# Altium PCB PhotodiodeBoard.PcbDoc
Units mm, origin at the board's own origin, x right, y up, seen from the top; angles counter-clockwise.
Board outline 61 x 33.2 mm, 4 copper layers (Top Layer, GND, 3V3, Bottom Layer), stack 0.778 mm thick; 109 components, 49 nets, 290 pads, 118 vias.
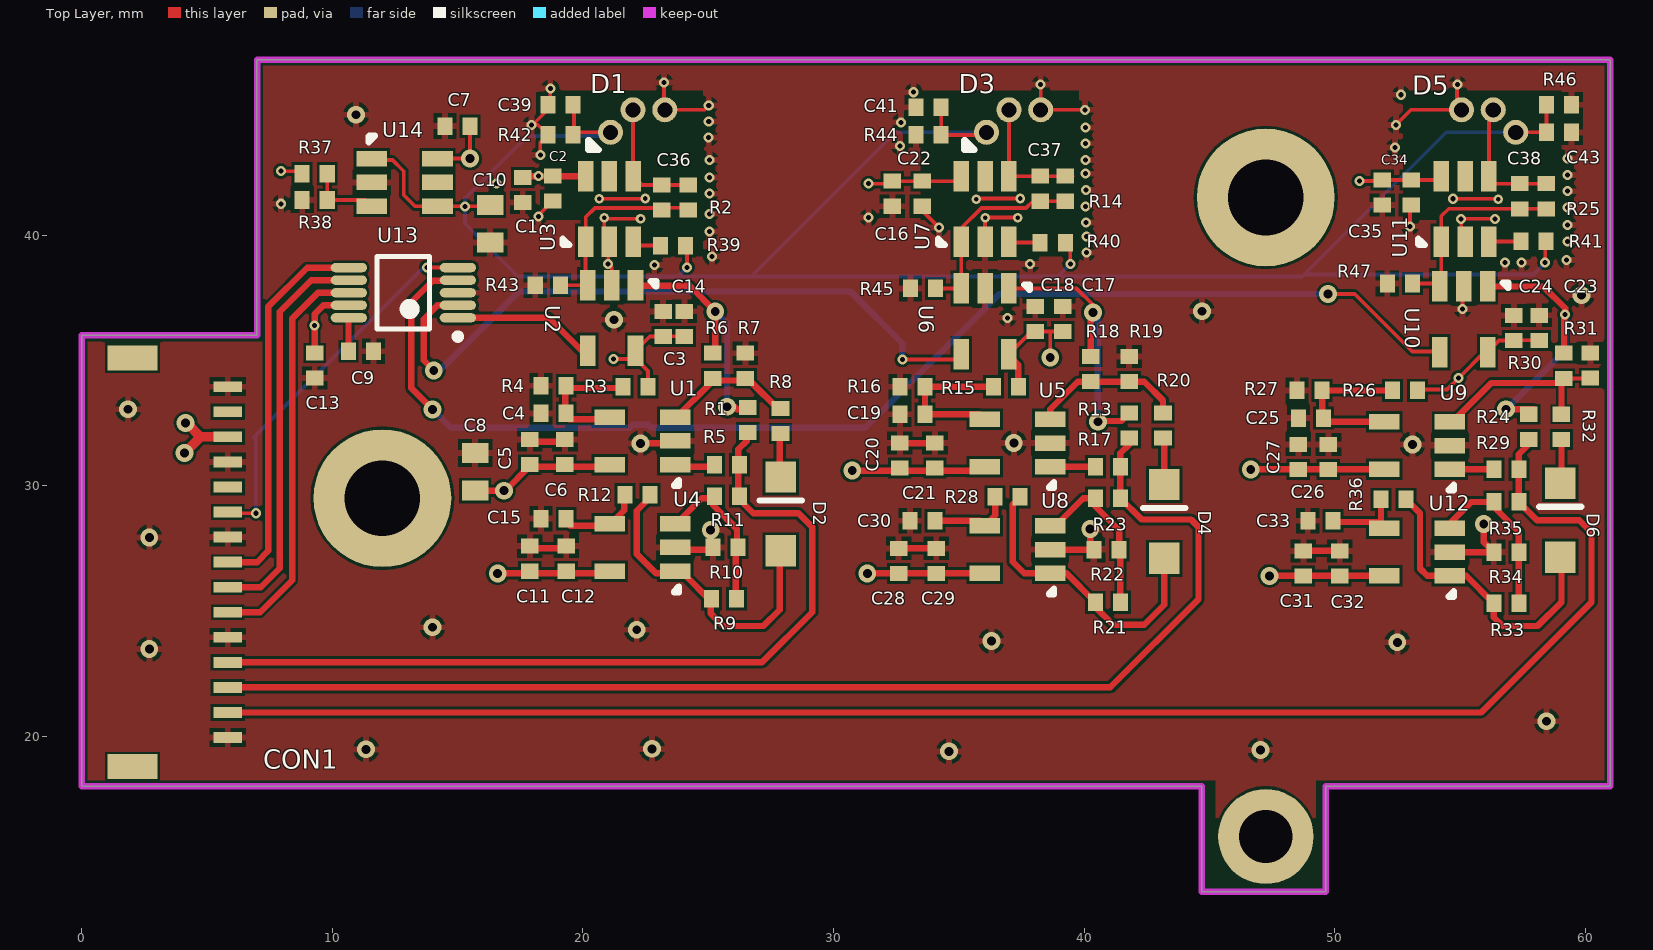
[diagram p0: Top Layer view]
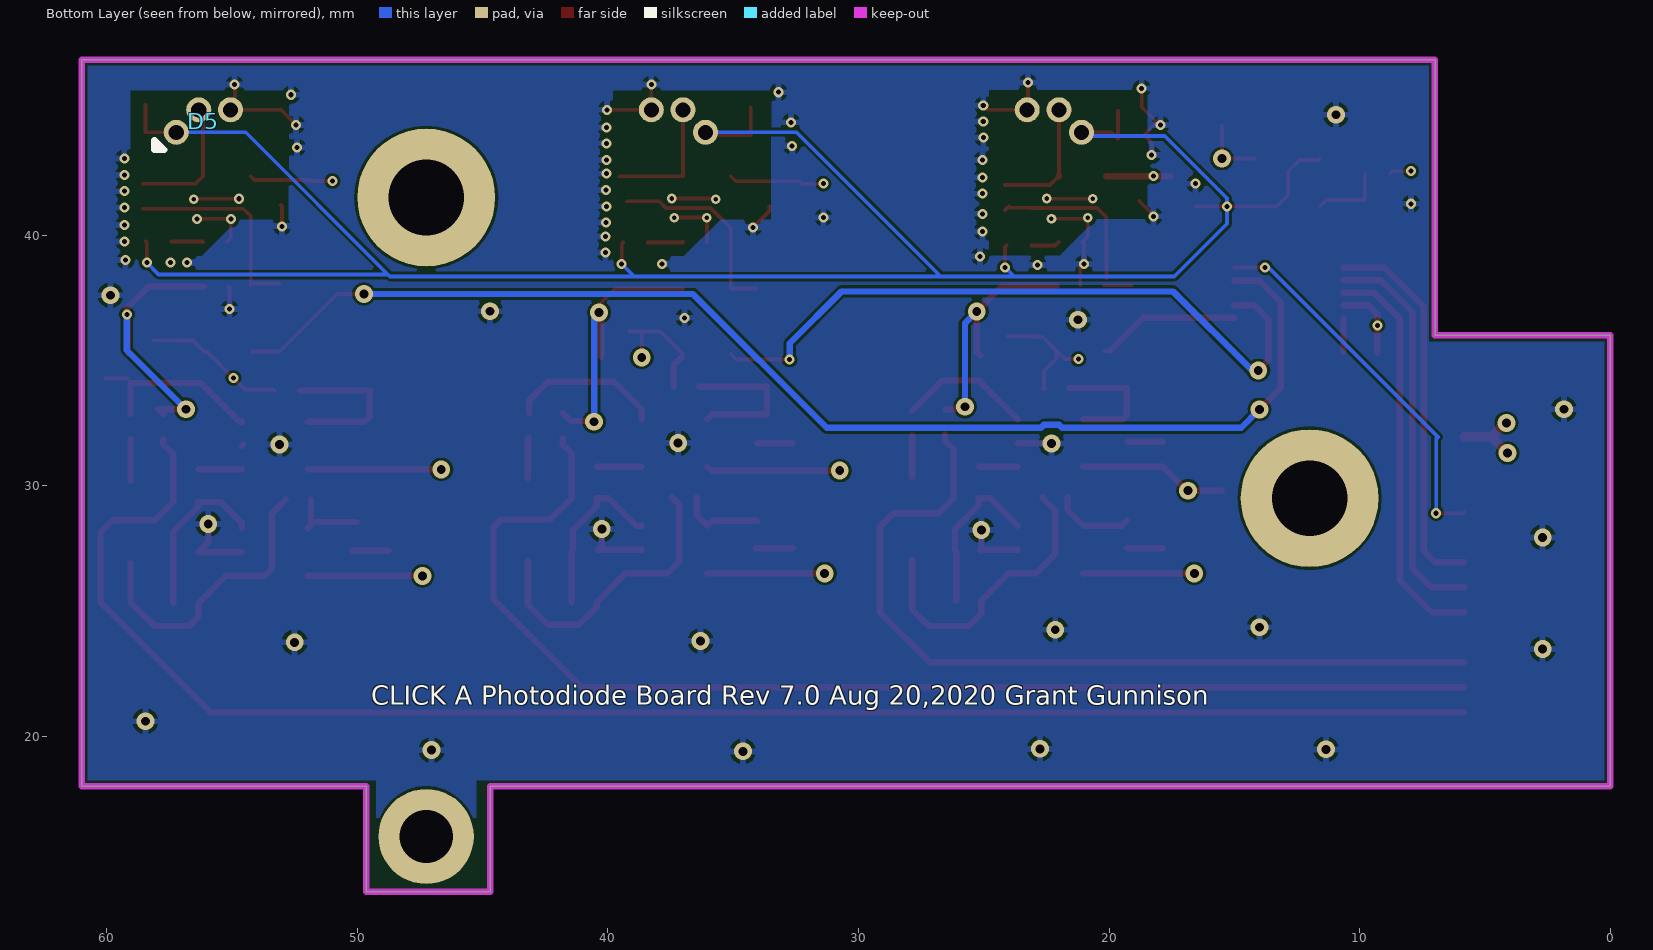
[diagram p1: Bottom Layer view, seen from below]
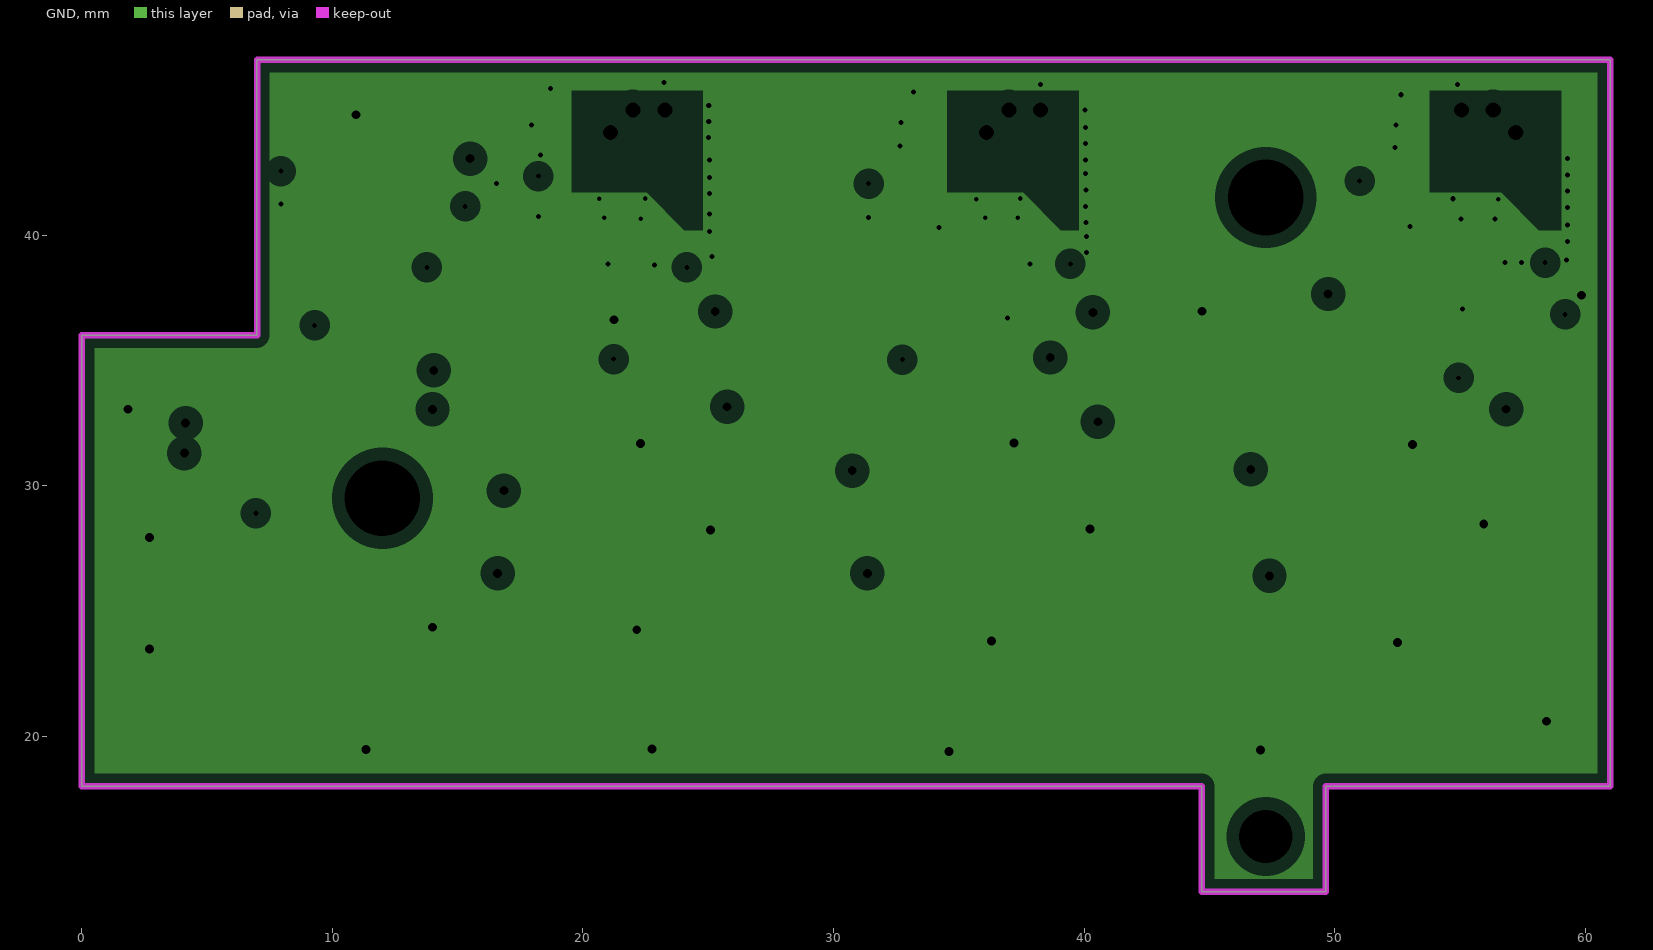
[diagram p2: GND, clearances drawn from the general rule]
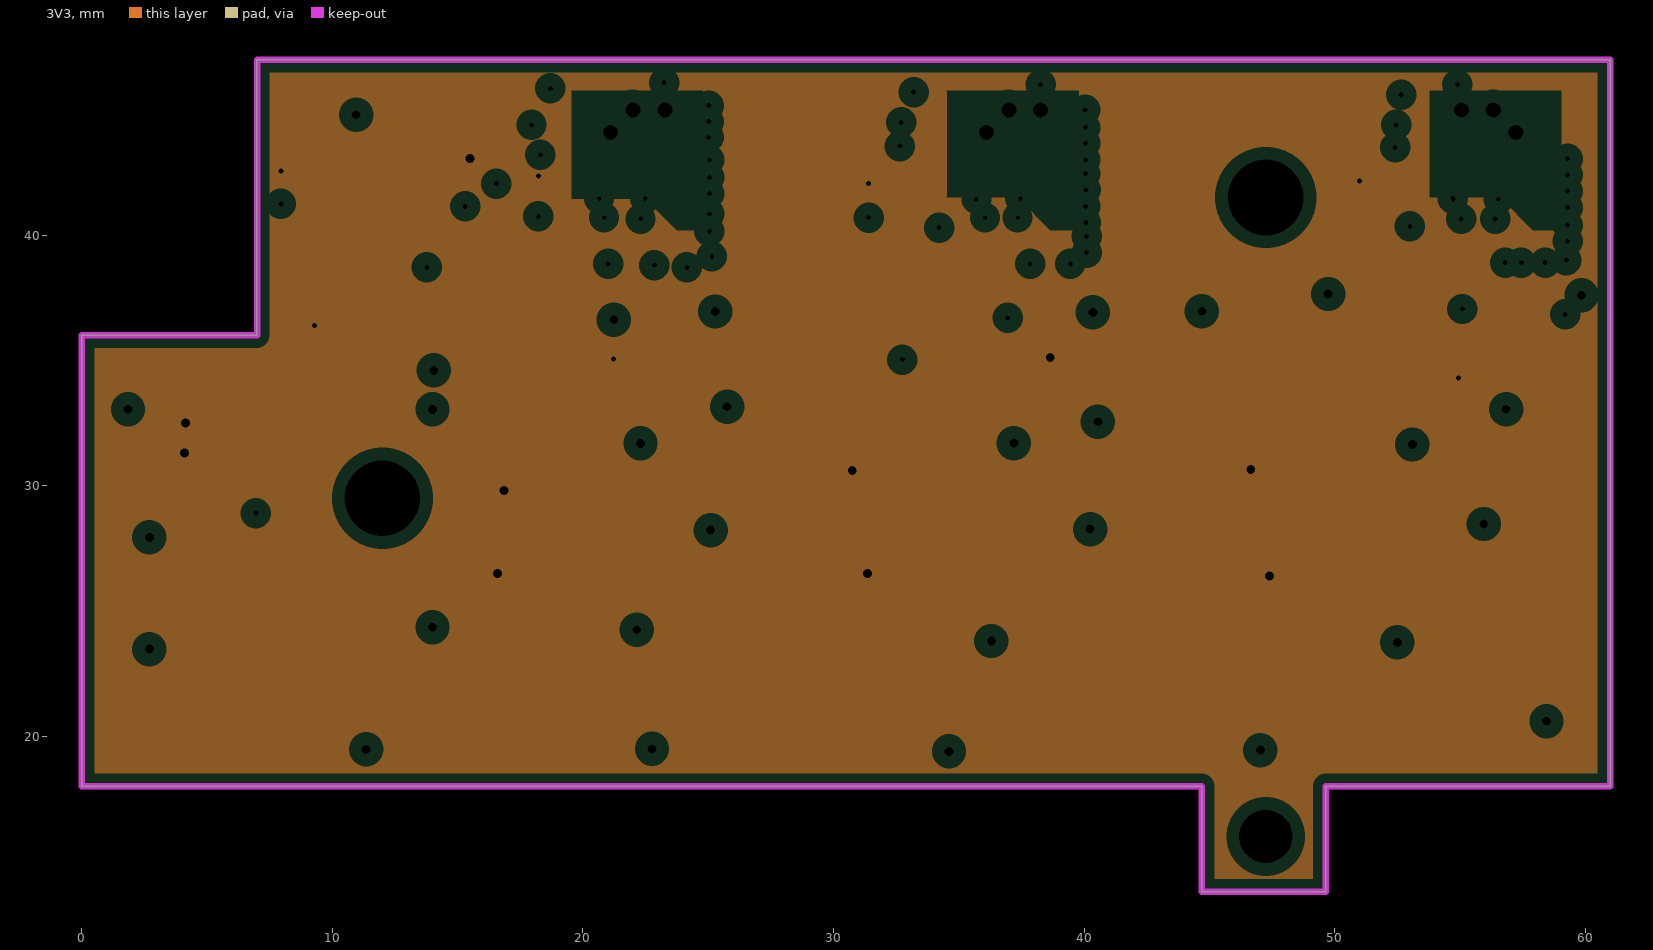
[diagram p3: 3V3, clearances drawn from the general rule]
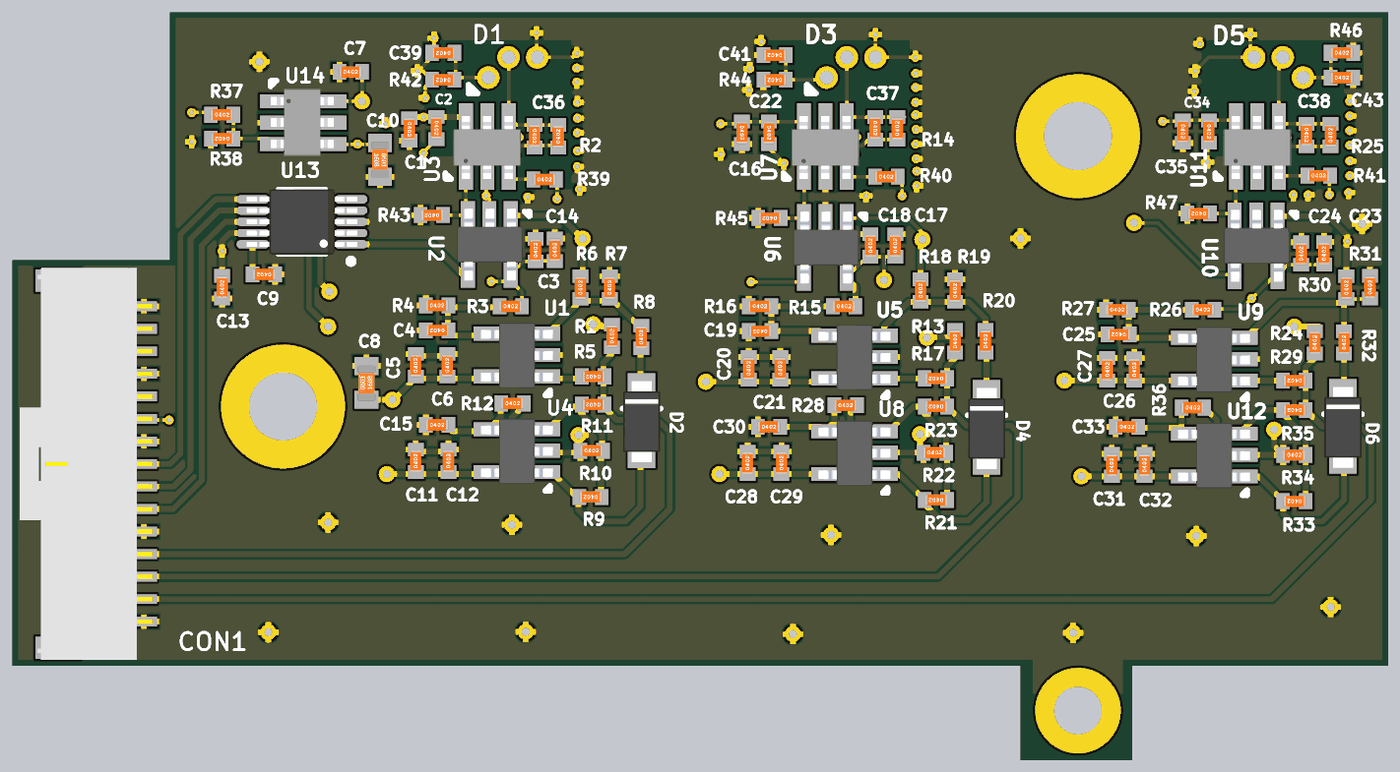
[diagram p4: 3D render of the assembled board from above, using the file's embedded part models]

## Layer stack, top to bottom
Top Solder: solder mask 0.0102, Solder Resist, Dk 3.5
Top Layer: signal copper 0.0356
Dielectric 1: core 0.254, FR-4, Dk 4.2
GND: plane copper 0.036, net GND
Dielectric 2: core 0.254, Dk 4.2
3V3: plane copper 0.036, net 3V3
Dielectric 3: prepreg 0.127, Dk 4.2
Bottom Layer: signal copper 0.0356
Bottom Solder: solder mask 0.0102, Solder Resist, Dk 3.5

## Board outline
49.65,18 49.65,13.8 44.7,13.8 44.7,18 0,18 0,36 6.985,36 6.985,47 61,47 61,18

## Design rules (kind name [scope] priority, off if disabled: settings)
Clearance [All] p1: gap=0.107 ignorepadtopadclearanceinfootprint=FALSE
HoleSize [All] p1: absolutevalues=TRUE maxlimit=4 minlimit=0.025 maxpercent=80.000 minpercent=20.000
MinimumAnnularRing [All] p1: minimumring=0.089
MinimumSolderMaskSliver [All] p1: minsoldermaskwidth=0.051
PlaneClearance [All] p1: clearance=0.508
PlaneConnect [All] p1: planeconnectstyle=Direct reliefexpansion=0.508 reliefentries=4 reliefconductorwidth=0.254 reliefairgap=0.254
PolygonConnect [All] p1: connectstyle=Relief reliefconductorwidth=0.254 reliefentries=4 polygonreliefangle="90 Angle" airgapwidth=0.152
RoutingVias [All] p1: holewidth=0.711 width=1.27 viastyle="Through Hole" minholewidth=0.711 minwidth=1.27 maxholewidth=0.711 maxwidth=1.27
SilkToSilkClearance [All] p1: silktosilkclearance=0
SilkToSolderMaskClearance [IsPad] p1: minsilkscreentomaskgap=0.152 clearancetoexposedcopper=TRUE
SolderMaskExpansion [All] p1: expansion=0.102 istentingtop=FALSE
Width [All] p1: maxlimit=0.381 minlimit=0.152 preferedwidth=0.152 minimp=50.000000 maximp=50.000000 favimp=50.000000
24 further rules are at their usual default settings.

## Components (designator, comment, footprint, x,y, rotation, side; value= is the part's Value field where it differs from the comment)
C1 "1nF" 0402 17.6,42.3 r270 top
C2 "10nF" 0402 18.8,42.364 r270 top
C3 "2.2uF" 0402 24.05,35.96 r90 top
C4 "1nF" 0402 19.336,32.886 r180 top
C5 "0.1uF" 0402 17.886,30.836 r90 top
C6 "2.2uF" 0402 19.286,30.836 r90 top
C7 "0.1uF" 0402 14.5,44.35 r0 top
C8 "22uF" 0603 15.7,29.8 r90 top
C9 "0.1uF" 0402 11.65,35.365 r180 top
C10 "22uF" 0603 16.3,41.2 r270 top
C11 "2.2uF" 0402 17.886,26.586 r90 top
C12 "0.1uF" 0402 19.336,26.586 r90 top
C13 "0.1uF" 0402 9.3,34.3 r90 top
C14 "0.1uF" 0402 23.2,35.95 r90 top
C15 "10p" 0402 18.336,28.686 r0 top
C16 "1nF" 0402 32.35,42.15 r270 top
C17 "0.1uF" 0402 39.15,36.15 r90 top
C18 "2.2uF" 0402 38.05,36.15 r90 top
C19 "1nF" 0402 33.65,32.85 r180 top
C20 "0.1uF" 0402 32.65,30.7 r90 top
C21 "2.2uF" 0402 34.05,30.7 r90 top
C22 "10nF" 0402 33.55,42.15 r270 top
C23 "0.1uF" 0402 58.16,35.8 r90 top
C24 "2.2uF" 0402 57.15,35.791 r90 top
C25 "1nF" 0402 49.55,32.7 r180 top
C26 "0.1uF" 0402 49.75,30.646 r90 top
C27 "2.2uF" 0402 48.55,30.65 r90 top
C28 "2.2uF" 0402 32.6,26.5 r90 top
C29 "0.1uF" 0402 34.1,26.5 r90 top
C30 "10p" 0402 33.05,28.6 r0 top
C31 "2.2uF" 0402 48.75,26.4 r90 top
C32 "0.1uF" 0402 50.2,26.4 r90 top
C33 "10p" 0402 48.927,28.6 r0 top
C34 "1nF" 0402 53.05,42.2 r270 top
C35 "10nF" 0402 51.9,42.2 r270 top
C36 ".1pF 0.1%" 0402 23.15,42 r270 top
C37 ".1pF 0.1%" 0402 38.25,42.35 r270 top
C38 ".1pF 0.1%" 0402 57.38,42.05 r270 top
C39 "1nF" 0402 19.6,45.2 r180 top
C41 "1nF" 0402 34.3,45.1 r180 top
C43 "1nF" 0402 58.456,44.1 r0 top
CON1 "T1M-15-F-SH-L-K" T1M-15-F-SH-L-K 3.8,27.6 r270 top
D1 "EPM605" EPM605 22,45 r180 top
D2 "1N4148" SOD123FL 27.9,30.35 r270 top
D3 "EPM605" EPM605 37,45 r180 top
D4 "1N4148" SOD123FL 43.2,30.05 r270 top
D5 "EPM605" EPM605 56.328,45 r0 bottom
D6 "1N4148" SOD123FL 59,30.1 r270 top
R1 "0" 0402 26.586,32.126 r90 top
R2 "10K" 0402 24.2,41 r90 top
R3 "15K" 0402 21.6,33.95 r0 top
R4 "49.9" 0402 18.336,33.986 r0 top
R5 "DNP" 0402 26.25,30.836 r180 top
R6 "DNP" 0402 25.186,34.286 r90 top
R7 "1K" 0402 26.486,34.286 r90 top
R8 "20K" 0402 27.886,32.086 r90 top
R9 "22K" 0402 26.136,25.486 r180 top
R10 "2K" 0402 25.186,27.536 r0 top
R11 "22K" 0402 26.25,29.586 r180 top
R12 "6.65K" 0402 21.686,29.636 r0 top
R13 "0" 0402 41.8,31.9 r90 top
R14 "20K" 0402 39.24,41.35 r90 top
R15 "15K" 0402 36.38,33.95 r0 top
R16 "49.9" 0402 32.65,33.95 r0 top
R17 "DNP" 0402 41.45,30.75 r180 top
R18 "DNP" 0402 40.273,34.15 r90 top
R19 "1K" 0402 41.8,34.15 r90 top
R20 "20K" 0402 43.15,31.9 r90 top
R21 "22K" 0402 41.45,25.35 r180 top
R22 "2K" 0402 40.4,27.45 r0 top
R23 "22K" 0402 41.45,29.5 r180 top
R24 "0" 0402 57.75,31.85 r90 top
R25 "20K" 0402 58.45,41.05 r90 top
R26 "15K" 0402 52.3,33.8 r0 top
R27 "49.9" 0402 48.5,33.8 r0 top
R28 "6.65K" 0402 36.45,29.55 r0 top
R29 "DNP" 0402 57.35,30.65 r180 top
R30 "DNP" 0402 59.15,34.286 r90 top
R31 "1K" 0402 60.2,34.3 r90 top
R32 "20K" 0402 59.05,31.85 r90 top
R33 "22K" 0402 57.35,25.3 r180 top
R34 "2K" 0402 56.35,27.35 r0 top
R35 "22K" 0402 57.35,29.35 r180 top
R36 "6.65K" 0402 51.85,29.45 r0 top
R37 "4K99" 0402 8.8,42.45 r0 top
R38 "499" 0402 9.8,41.4 r180 top
R39 "33" 0402 23.1,39.58 r0 top
R40 "33" 0402 38.25,39.7 r0 top
R41 "33" 0402 57.427,39.75 r0 top
R42 "20K" 0402 19.6,44 r180 top
R43 "DNP" 0402 19.1,38 r180 top
R44 "20K" 0402 34.3,44 r180 top
R45 "DNP" 0402 34.073,37.87 r180 top
R46 "20K" 0402 58.456,45.2 r0 top
R47 "DNP" 0402 53.1,38.067 r180 top
U1 "LTC6752" "TSOT-23 5 LEAD" 23.686,30.836 r90 top
U2 "LTC6752" "TSOT-23 5 LEAD" 22.1,38 r180 top
U3 "LTC6268-10" "TSOT-23 6 LEAD" 20.112,39.73 r0 top
U4 "LTC6752" "TSOT-23 5 LEAD" 23.686,26.586 r90 top
U5 "LTC6752" "TSOT-23 5 LEAD" 38.65,30.75 r90 top
U6 "LTC6752" "TSOT-23 5 LEAD" 37,37.87 r180 top
U7 "LTC6268-10" "TSOT-23 6 LEAD" 35.1,39.73 r0 top
U8 "LTC6752" "TSOT-23 5 LEAD" 38.65,26.5 r90 top
U9 "LTC6752" "TSOT-23 5 LEAD" 54.6,30.65 r90 top
U10 "LTC6752" "TSOT-23 5 LEAD" 56.1,37.95 r180 top
U11 "LTC6268-10" "TSOT-23 6 LEAD" 54.255,39.73 r0 top
U12 "LTC6752" "TSOT-23 5 LEAD" 54.6,26.4 r90 top
U13 "AD5664R" MSOP-10 12.837,37.7 r180 top
U14 "LTC6258" "TSOT-23 6 LEAD" 11.58,43.05 r270 top

## Footprints (in the part's own frame and the unit in brackets; to place one, negate y for a bottom-side part, rotate by r counter-clockwise, add the part's x,y. Pads: shape width x height; smd on the part's side, far side on the other; paste and mask are expansions set on the pad)
0402 [mm]
  rect 0.6x0.7 smd: 1(0,0) 2(1,0)
  body extent -0.03,-0.25 0.99,0.25, height 0.49
0603 [mm]
  rect 0.8x1.05 smd: 1(0,0) 2(1.5,0)
  body extent -0.06,-0.4 1.54,0.4, height 0.8
EPM605 [mm]
  round 1 hole 0.6: 1(0.898,0.898) 2(0,0) 3(-1.27,0)
  silkscreen extent 1.37,1.22 1.78,1.6, body extent 0,0 0,0, height 1.25
MSOP-10 [mm]
  oval 1.45x0.368 smd: 1(-2.175,1) 2(-2.175,0.5) 3(-2.175,0) 4(-2.175,-0.5) 5(-2.175,-1) 6(2.175,-1) 7(2.175,-0.5) 8(2.175,0) 9(2.175,0.5) 10(2.175,1)
  silkscreen extent -2.3,-1.45 1.05,1.87, body extent -2.45,-1.45 2.45,1.45, height 1.1
SOD123FL [mm]
  rect 1.25x1.22 smd: 1(2.95,0) 2(0,0)
  silkscreen extent 0.94,-0.84 0.94,0.84, body extent -0.28,-0.82 3.32,0.83, height 0.95
T1M-15-F-SH-L-K [mil]
  rect 17x45 smd: 1(301.18,80) 2(261.81,80) 3(222.44,80) 4(183.07,80) 5(143.7,80) 6(104.33,80) 7(64.96,80) 8(25.59,80) 9(-13.78,80) 10(-53.15,80) 11(-92.52,80) 12(-131.89,80) 13(-171.26,80) 14(-210.63,80) 15(-250,80)
  rect 39.37x78.74 smd: GND(-295,-70) GND(347,-70)
  body extent -317,-137 368,95, height 182
"TSOT-23 5 LEAD" [mm]
  rect 0.62x1.22 smd: 1(0,0) 2(0.95,0) 3(1.9,0) 4(1.9,2.62) 5(0,2.62)
  silkscreen extent -0.84,-0.15 -0.61,0.05, body extent -0.52,-0.28 2.38,2.91, height 0.95
"TSOT-23 6 LEAD" [mm]
  rect 0.62x1.22 smd: 1(0,0) 2(0.95,0) 3(1.9,0) 4(1.9,2.62) 5(0.95,2.62) 6(0,2.62)
  silkscreen extent -0.91,-0.13 -0.66,0.13, body extent -0.56,-0.13 2.44,2.67, height 0.86

## Part data
C1 C2 C3 C4 C5 C6 C7 C9 C11 C12 C13 C14 C15 C16 C17 C18 C19 C20 C21 C22 C23 C24 C25 C26 C27 C28 C29 C30 C31 C32 C33 C34 C35 C36 C37 C39 C41 C43: library part "Cap 0402"
C8 C10: library part "Cap 0603"
C38: library part "Cap 0402", ".1pF"
D2 D4 D6: "Fast switching diode SMD"
R1 R2 R3 R4 R7 R8 R9 R10 R11 R12 R13 R14 R15 R16 R19 R20 R21 R22 R23 R24 R25 R26 R27 R28 R31 R32 R33 R34 R35 R36 R37 R38 R42 R44 R46: library part "Res 0402"
R5 R6 R17 R18 R29 R30: library part "Res 0402", "0 ohm"
R39 R40 R41: library part "Res 0402", "33 ohm"
R43 R45 R47: library part "Res 0402", "50 ohm"

## Free pads (board coordinates)
  round 5.5 hole 3.02: 19(47.25,41.5) 21(12,29.5)
  round 3.8 hole 2.12: 20(47.25,16)

## Via types
v1: diameter 0.4, hole 0.2, Top Layer to Bottom Layer, 69 vias
v2: diameter 0.711, hole 0.356, Top Layer to Bottom Layer, 40 vias
v3: diameter 0.38, hole 0.18, Top Layer to Bottom Layer, 9 vias

## Nets (pads, with @x,y where several pads share a name; then routed paths per layer and width w, separated by ;. In a path a pad name is that pad's centre, name@x,y a point inside that pad or via, vN(x,y) a via of type N, cw(c..) or ccw(c..) an arc to the next point about the centre after c; other vN are vias at no path point)
3V3: C1.1 C2.1 C3.1 C5.1 C6.1 C7.2 C8.1 C11.1 C12.1 C13.2 C14.1 C16.1 C17.1 C18.1 C20.1 C21.1 C22.1 C23.1 C24.1 C26.1 C27.1 C28.1 C29.1 C31.1 C32.1 C34.1 C35.1 CON1.13 R3.2 R15.2 R26.2 R37.1 U1.5 U2.5 U3.6 U4.5 U5.5 U6.5 U7.6 U8.5 U9.5 U10.5 U11.6 U12.5 U13.9 U14.6 | length 64.9
  Top Layer w0.152: v1(7.95,42.55) 8.7,42.55 R37.1 ; U14.6 15.45,43.05 15.5,43.1 C7.2 ; v1(21.227,35.05) 21.77,35.05 U2.5 ; R3.2@22.6,33.9 R3.2 22.6,34.58 22.1,35.08 U2.5 ; C3.1 23.21,35.96 C14.1 22.67,35.95 U2.5 ; v1(31.4,42.05) 32.25,42.05 C16.1 C22.1 34.9,42.15 U7.6 ; U6.5 37.9,36.15 C18.1 38.6,36.15 ; v2(38.65,35.114) 38.65,36.1 38.6,36.15 ; C17.1 38.6,36.15 ; v1(51,42.158) 51.858,42.158 C35.1 C34.1 54.105,42.2 U11.6 ; R26.2 53.332,33.832 54.482,33.832 v1(54.95,34.3) 55.98,35.33 U10.5 56.561,35.791 C24.1 57.159,35.8 C23.1@58.139,35.8
  Top Layer w0.254: C13.2 9.3,36.85 9.65,37.2 U13.9 ; C8.1@15.5,29.8 v2(16.85,29.8) 16.9,29.8 17.85,30.75 U1.5@21.03,30.75 ; v2(16.6,26.5) C12.1@19.3,26.5 ; C1.1@17.55,42.35 U3.6 ; C12.1@19.3,26.492 C12.1@19.3,26.5 ; U4.5@21.03,26.5 21.01,26.48 20.99,26.5 C12.1@19.3,26.5 ; v2(30.75,30.6) 35.88,30.6 U5.5 ; v2(31.35,26.5) U8.5 ; U6.5@37.046,35.15 37.38,34.816 R15.2 ; v2(46.65,30.65) U9.5 ; v2(47.4,26.4) U12.5
  Top Layer w0.381: v2(4.1,31.3) 4.75,31.95 ; v2(4.15,32.503) 4.197,32.503 4.75,31.95 ; CON1.13 4.75,31.95
  other v1: 9.3,36.4 18.225,42.35
  other v2: 15.5,43.05
BIST1: CON1.4 R1.1 R5.1 R11.1 | length 33.7
  Top Layer w0.254: CON1.4 27.15,22.95 29.15,24.95 29.15,28.353 28.603,28.9 26.8,28.9 26.2,29.5 26.2,30.75 26.2,31.45 26.55,31.8 R1.1@26.55,32.04
BIST2: CON1.3 R13.1 R17.1 R23.1 | length 49.2
  Top Layer w0.254: CON1.3 41.05,21.95 44.565,25.465 44.565,28.35 44.265,28.65 42.3,28.65 R23.1 R17.1 41.45,31.296 41.8,31.646 R13.1
BIST3: CON1.2 R24.1 R29.1 R35.1 | length 65.1
  Top Layer w0.254: CON1.2 55.845,20.95 60.25,25.355 60.25,28.139 59.764,28.625 58.075,28.625 R35.1 R29.1 57.35,31.25 57.75,31.65 R24.1
CH_A: U2.4 U13.1 | length 5.7
  Top Layer w0.152: U2.4@19.954,35.38 U2.4
  Top Layer w0.254: U13.1 16.012,36.7 18.634,36.7 U2.4@19.954,35.38
CH_B: U6.4 U13.2 | length 27.8
  Top Layer w0.152: v1(32.75,35.031) 34.881,35.031 U6.4
  Top Layer w0.254: v2(14.05,34.6) 13.65,35 13.65,36.648 14.202,37.2 U13.2
  Bottom Layer w0.254: v2(14.05,34.6) 14.3,34.6 17.45,37.75 30.68,37.75 32.75,35.68 v1(32.75,35.031)
CH_C: U10.4 U13.4 | length 50.8
  Top Layer w0.152: v2(49.738,37.65) 50.798,37.65 53.093,35.355 54.175,35.355 U10.4
  Top Layer w0.254: v2@14,33.234 v2(14,33.046) 13.15,33.896 13.15,37.325 14.004,38.179 14.991,38.179 U13.4
  Bottom Layer w0.254: v2(14,33.046) 14.734,32.312 21.883,32.312 21.995,32.424 22.605,32.424 22.717,32.312 31.274,32.312 36.612,37.65 v2(49.738,37.65)
CH_D: CON1.10 U13.5 | length 15.2
  Top Layer w0.152: CON1.10 5.882,28.9 v1(6.95,28.9) ; v1(13.777,38.712) 15.001,38.712 U13.5
  Bottom Layer w0.152: v1(6.95,28.9) 6.95,31.864 6.871,31.943 13.639,38.712 v1(13.777,38.712)
CS2: CON1.8 U13.6 | length 15.4
  Top Layer w0.254: CON1.8 7,26.95 7.45,27.4 7.45,37.15 9,38.7 U13.6
DNC: CON1.14
GND: C1.2 C2.2 C3.2 C4.2 C5.2 C6.2 C7.1 C8.2 C9.1 C10.2 C11.2 C12.2 C13.1 C14.2 C15.1 C16.2 C17.2 C18.2 C19.2 C20.2 C21.2 C22.2 C23.2 C24.2 C25.2 C26.2 C27.2 C28.2 C29.2 C30.1 C31.2 C32.2 C33.1 C34.2 C35.2 C39.2 C41.2 C43.2 CON1.1 CON1.5 CON1.9 CON1.12 CON1.15 D1.3 D3.3 D5.3 R4.1 R7.2 R10.1 R16.1 R19.2 R22.1 R27.1 R31.2 R34.1 R38.2 R42.2 R43.2 R44.2 R45.2 R46.2 R47.2 U1.2 U2.2 U3.2 U4.2 U5.2 U6.2 U7.2 U8.2 U9.2 U10.2 U11.2 U12.2 U13.3 U14.2 | length 47.4
  Top Layer w0.152: v1(17.95,44.4) v1@18,44.4 ; v1@18.25,40.814 C2.2 ; v1(18.3,43.2) 18.3,43.7 R42.2 18.2,44.4 v1@18,44.4 ; v1(18.7,45.85) 18.7,45.1 v1@18,44.4 ; v3(20.65,41.45) 22.476,41.45 v3(22.486,41.46) ; U2.2 21.15,38.71 v1(21.01,38.85) 21.01,39.678 U3.2 20.85,39.942 v3(20.85,40.701) 20.901,40.65 v3(22.3,40.65) ; v1(23.243,46.085) 23.243,45.027 D1.3 24.854,45 v1(25.023,45.169) ; C22.2 33.55,40.965 v1(34.215,40.3) ; v3@35.7,41.45 35.71,41.46 v3(37.45,41.46) ; U7.2 v3(36.05,40.7) v3(37.35,40.7) ; v1(38.27,46.009) D3.3 v1(40.04,45) ; v1(52.448,44.4) 53.048,45 54.885,45 54.885,45.993 v1(54.9,46.009) ; v1(53,40.35) 53,41.15 C34.2 ; v1(54.719,41.45) v3@56.531,41.45 ; v1(55.1,37.05) 55.1,37.9 U10.2 ; U11.2 55.05,39.885 v1(55.05,40.65) v1@56.217,40.65
  Top Layer w0.254: C11.2@17.85,27.5 C12.2@19.3,27.5 ; C5.2@17.85,31.75 C6.2@19.25,31.75 ; v2(22.3,31.688) 22.312,31.7 U1.2@23.65,31.7 ; U4.2@23.65,27.45 R10.1@25.1,27.45 ; v2(25.1,28.227) R10.1@25.1,27.45 ; C28.2 C29.2 ; C20.2 C21.2 ; U8.2 R22.1 40.244,27.606 v2(40.244,28.268) ; C31.2 C32.2 ; U9.2@54.554,31.646 U9.2 ; U12.2 R34.1 55.95,27.75 v2(55.95,28.473) ; R10.1@25.1,27.45 25.1,27.4 25.15,27.45 R10.1@25.1,27.45
  other v1: 36.95,36.7 22.85,38.8 37.85,38.851 56.8,38.9 57.45,38.9 59.25,39 25.15,39.15 40.1,39.3 59.3,39.75 40.1,39.95 25.05,40.15 59.3,40.4 40.073,40.5 56.4,40.65 31.4,40.701 18.225,40.75 25.05,40.85 59.3,41.1 40.05,41.15 7.95,41.25 25.05,41.65 59.3,41.75 40.073,41.8 16.55,42.05 25.05,42.3 59.3,42.4 40.05,42.45 25.05,43 40.05,43 59.3,43.05 52.414,43.5 32.65,43.55 40.05,43.664 25.022,43.9 40.05,44.29 32.7,44.5 25.023,44.527 52.65,45.6 33.2,45.7
  other v2: 34.611,19.4 47.034,19.45 11.35,19.48 22.761,19.5 58.454,20.6 2.7,23.48 52.5,23.75 36.3,23.8 22.15,24.25 14,24.35 2.7,27.938 53.1,31.646 37.197,31.7 1.85,33.05 21.236,36.62 44.7,36.96 59.85,37.6 10.95,44.803
  other v3: 35.7,41.43 56.531,41.43
MOSI: CON1.6 U13.8 | length 16.2
  Top Layer w0.254: CON1.6 7.127,24.95 8.4,26.223 8.4,36.669 9.431,37.7 U13.8
NetC4_1: C4.1 R3.1 R4.2 U1.4 | length 5.2
  Top Layer w0.254: U1.4@21.03,32.65 19.45,32.65 19.3,32.8 19.3,33.9 R3.1@21.6,33.9
NetC9_2: C9.2 U13.10 | length 1.3
  Top Layer w0.254: C9.2@10.65,35.35 U13.10@10.65,36.688
NetC15_2: C15.2 R12.1 U4.4 | length 3.2
  Top Layer w0.254: C15.2@19.3,28.6 19.5,28.4 21.03,28.4 21.65,29.02 R12.1@21.65,29.55
NetC19_1: C19.1 R15.1 R16.2 U5.4 | length 6.3
  Top Layer w0.254: U5.4 35.83,32.85 C19.1 R16.2 R15.1
NetC25_1: C25.1 R26.1 R27.2 U9.4 | length 6.4
  Top Layer w0.254: U9.4 49.7,32.55 C25.1 49.5,32.75 R27.2 R26.1
NetC30_2: C30.2 R28.1 U8.4 | length 3.4
  Top Layer w0.254: C30.2 35.83,28.6 U8.4 36.45,28.82 R28.1
NetC33_2: C33.2 R36.1 U12.4 | length 3.1
  Top Layer w0.254: C33.2@50.05,28.55 51.73,28.55 U12.4@51.85,28.43 ; R36.1 U12.4@51.85,28.43 ; U12.4 U12.4@51.85,28.43
NetC36_1: C36.1 D1.2 R2.2 U3.4 | length 4.9
  Top Layer w0.152: U3.4@22,42.362 D1.2 ; U3.4 22.362,42 R2.2@24.15,42
  Top Layer w0.254: U3.4@22,42.362 U3.4
NetC36_2: C36.2 R2.1 R43.1 U2.3 U3.1 | length 7.8
  Top Layer w0.152: R43.1 U2.3 ; U2.3@20.108,38.292 20.108,39.726 U3.1 20.112,40.712 20.485,41.085 20.493,41.077 23.133,41.077 23.15,41.094 23.997,41.097 R2.1@24,41.1 ; R2.1@24,41.15 R2.1@24.15,41
NetC37_1: C37.1 D3.2 R14.2 U7.4 | length 5.2
  Top Layer w0.152: D3.2 U7.4 R14.2@39.55,42.35
NetC37_2: C37.2 R14.1 R45.1 U6.3 U7.1 | length 8
  Top Layer w0.152: R45.1 U6.3 U7.1 35.1,40.277 35.903,41.08 37.68,41.08 37.95,41.35 C37.2 R14.1
NetC38_1: C38.1 D5.2 R25.2 U11.4 | length 5.2
  Top Layer w0.152: D5.2@56.155,45 U11.4 56.455,42.05 57.35,42.05 R25.2@58.55,42.05
NetC38_2: C38.2 R25.1 R47.1 U10.3 U11.1 | length 8.3
  Top Layer w0.152: R47.1 54.192,38.067 54.255,38.005 54.255,40.755 54.55,41.05 C38.2@57.35,41.05 ; C38.2@57.35,41.05 R25.1@58.55,41.05
NetD2_1: D2.1 R9.2 R12.2 U4.1 | length 11.9
  Top Layer w0.254: R12.2@22.65,29.55 22.65,29.505 22.148,29.003 22.148,27.272 22.92,26.5 23.65,26.5 24,26.5 25.1,25.4 25.1,24.9 25.6,24.4 27.2,24.4 27.85,25.05 D2.1@27.85,27.05
NetD2_2: D2.2 R8.1 | length 1.6
  Top Layer w0.254: D2.2@27.85,30.35 R8.1@27.85,32
NetD4_1: D4.1 R21.2 R28.2 U8.1 | length 12
  Top Layer w0.254: R28.2 37.15,29.25 37.15,26.965 37.615,26.5 U8.1 39.3,26.5 R21.2 40.45,25.161 41.161,24.45 42.4,24.45 43.2,25.25 D4.1@43.2,27
NetD4_2: D4.2 R20.1 | length 1.6
  Top Layer w0.254: R20.1 43.2,31.85 D4.2@43.2,30.3
NetD6_1: D6.1 R33.2 R36.2 U12.1 | length 11.8
  Top Layer w0.254: R36.2 53.404,28.896 53.404,26.696 53.7,26.4 U12.1 55.25,26.4 R33.2 56.35,24.746 56.696,24.4 58.095,24.4 59.05,25.355 D6.1@59.05,26.9
NetD6_2: D6.2 R32.1 | length 1.6
  Top Layer w0.254: D6.2@59.05,30.2 R32.1
NetR1_2: R1.2 R6.2 U2.1 | length 10.2
  Top Layer w0.254: U2.1@22.1,37.972 24.262,37.972 v2(25.284,36.95) 25.284,35.334 R6.2@25.15,35.2 ; v2(25.754,33.15) 26.048,33.15 26.158,33.04 R1.2@26.55,33.04
  Bottom Layer w0.254: v2(25.284,36.95) 25.754,36.48 v2(25.754,33.15)
NetR5_2: R5.2 U1.1 | length 1.6
  Top Layer w0.254: U1.1@23.65,30.75 R5.2@25.2,30.75
NetR6_1: R6.1 R7.1 R8.2 U1.3 | length 5.4
  Top Layer w0.254: U1.3@23.65,32.65 25.15,34.15 25.15,34.2 26.5,34.2 26.65,34.2 R8.2@27.85,33
NetR9_1: R9.1 R10.2 R11.2 U4.3 | length 6.5
  Top Layer w0.254: U4.3@23.65,28.4 24.75,29.5 25.2,29.5 25.2,29.224 26.15,28.274 26.15,27.45 26.15,27.407 26.1,27.357 R9.1@26.1,25.4
NetR13_2: R13.2 R18.2 U6.1 | length 11.6
  Top Layer w0.152: U6.1 39.701,37.87 40.35,37.221 v2(40.35,36.915)
  Top Layer w0.254: R18.2 40.273,36.838 v2(40.35,36.915) ; v2(40.55,32.55) 40.581,32.581 41.481,32.581 R13.2
  Bottom Layer w0.254: v2(40.35,36.915) 40.55,36.715 v2(40.55,32.55)
NetR17_2: R17.2 U5.1 | length 1.8
  Top Layer w0.254: U5.1 R17.2
NetR18_1: R18.1 R19.1 R20.2 U5.3 | length 6.2
  Top Layer w0.254: U5.3 38.65,33.046 39.754,34.15 40.25,34.15 R19.1 42.4,34.15 43.15,33.4 R20.2
NetR21_1: R21.1 R22.2 R23.2 U8.3 | length 6.8
  Top Layer w0.254: U8.3 38.871,28.4 39.971,29.5 R23.2 40.45,29.177 41.4,28.227 R22.2 41.45,27.4 R21.1
NetR24_2: R24.2 R30.2 U10.1 | length 11.4
  Top Layer w0.152: v1@59.15,36.788 v1(59.2,36.838)
  Top Layer w0.254: U10.1 58.327,37.95 59.2,37.077 v1(59.2,36.838) ; v2(56.842,33.05) 57.95,33.05 R24.2 ; R30.2 v1@59.15,36.788
  Bottom Layer w0.254: v2(56.842,33.05) 59.2,35.408 v1(59.2,36.838)
NetR29_2: R29.2 U9.1 | length 1.8
  Top Layer w0.254: U9.1 R29.2
NetR30_1: R30.1 R31.1 R32.2 U9.3 | length 7.2
  Top Layer w0.152: R30.1 59.164,34.272 R31.1@60.05,34.272
  Top Layer w0.254: U9.3 54.7,32.55 56.25,34.1 59.05,34.1 R32.2
NetR33_1: R33.1 R34.2 R35.2 U12.3 | length 6.8
  Top Layer w0.254: U12.3 54.6,28.5 55.45,29.35 R35.2 56.35,29.161 57.35,28.161 R34.2 R33.1
NetR37_2: R37.2 R38.1 U14.3 | length 2.9
  Top Layer w0.152: R37.2 R38.1 11.33,41.4 U14.3
NetR39_1: R39.1 U3.3 | length 1.2
  Top Layer w0.152: U3.3 22.162,39.58 R39.1
NetR40_1: R40.1 U7.3 | length 1.4
  Top Layer w0.152: U7.3 37.03,39.7 R40.1@38.4,39.7
NetR41_1: R41.1 U11.3 | length 1.3
  Top Layer w0.152: U11.3 56.175,39.75 R41.1
SCLK: CON1.7 U13.7 | length 15.9
  Top Layer w0.254: CON1.7 7.149,25.95 7.9,26.701 7.9,36.941 9.159,38.2 U13.7
VGND: C10.1 C39.1 C41.1 C43.1 D1.1 D3.1 D5.1 R39.2 R40.2 R41.2 R42.1 R44.1 R46.1 U14.1 U14.4 | length 92.7
  Top Layer w0.152: U14.1 11.63,43 12.4,43 12.85,42.55 12.85,41.6 13.3,41.15 U14.4 v1(15.3,41.15) C10.1@16.55,41.15 ; C39.1@19.65,44.95 19.65,43.85 19.902,44.102 D1.1 ; R39.2 24.15,39.53 v1(24.15,38.711) ; C41.1 R44.1 36,44 D3.1 ; R40.2@39.4,39.7 39.45,39.65 v1(39.45,38.851) ; D5.1@57.053,44.102 57.055,44.1 C43.1 R46.1 ; v1(58.4,38.9) 58.4,39.723 R41.2
  Bottom Layer w0.152: D1.1 20.95,43.95 17.778,43.95 15.3,41.472 v1(15.3,41.15) 15.3,40.45 17.4,38.35 23.789,38.35 ; v1(24.15,38.711) 23.789,38.35 ; D3.1 32.47,44.102 26.8,38.432 26.8,38.35 ; v1(39.45,38.851) 38.95,38.351 ; D5.1@57.053,44.102 54.452,44.102 48.783,38.433 ; v1(58.4,38.9) 57.933,38.433 48.783,38.433 ; 23.789,38.35 26.8,38.35 ; 26.8,38.35 38.95,38.35 ; 38.95,38.35 48.7,38.35 48.783,38.433
pads on no net: CON1.11 CON1.GND U3.5 U7.5 U11.5 U14.5

## Polygon pours and split planes (outlines as drawn)
GND on Bottom Layer "Bottom Layer-GND" (solid, pour order 0): 0.25,18.25 0.25,35.75 7.25,35.75 7.25,46.75 60.75,46.75 60.75,18.25 49.25,18.25 49.25,14.25 45.25,14.25 45.25,18.25
GND on Top Layer "Top Layer-GND" (solid, pour order 1): 0.25,35.75 0.25,18.25 45.25,18.25 45.25,14.25 49.25,14.25 49.25,18.25 60.75,18.25 60.75,46.75 7.25,46.75 7.25,35.75
no net on Assembly Notes "NONET_L-01_P-001" (solid): 58.65,33.758 58.65,35.703 59.726,35.703 59.726,33.758
no net on Assembly Notes "NONET_L-01_P-001" (solid): 57.214,31.424 57.214,33.368 58.29,33.368 58.29,31.424
no net on Assembly Notes "NONET_L-01_P-001" (solid): 57.85,30.129 55.905,30.129 55.905,31.205 57.85,31.205
no net on Assembly Notes "NONET_L-01_P-001" (solid): 39.733,33.685 39.733,35.629 40.808,35.629 40.808,33.685
no net on Assembly Notes "NONET_L-01_P-001" (solid): 41.272,31.44 41.272,33.385 42.347,33.385 42.347,31.44
no net on Assembly Notes "NONET_L-01_P-001" (solid): 41.931,30.256 39.987,30.256 39.987,31.331 41.931,31.331
no net on Assembly Notes "NONET_L-01_P-001" (solid): 26.751,30.29 24.806,30.29 24.806,31.366 26.751,31.366
no net on Assembly Notes "NONET_L-01_P-001" (solid): 26.015,31.662 26.015,33.606 27.091,33.606 27.091,31.662
no net on Assembly Notes "NONET_L-01_P-001" (solid): 24.66,33.803 24.66,35.748 25.736,35.748 25.736,33.803
no net on Assembly Notes "NONET_L-01_P-001" (solid): 20.306,44.464 20.306,43.702 20.814,43.194 21.322,43.194 22.338,44.21 23.608,44.21 24.116,44.718 24.116,45.226 23.608,45.734 21.576,45.734
no net on Assembly Notes "NONET_L-01_P-001" (solid): 35.307,44.464 35.307,43.702 35.815,43.194 36.323,43.194 37.339,44.21 38.609,44.21 39.117,44.718 39.117,45.226 38.609,45.734 36.577,45.734
no net on Assembly Notes "NONET_L-01_P-001" (solid): 57.994,44.464 57.994,43.702 57.486,43.194 56.978,43.194 55.962,44.21 54.692,44.21 54.184,44.718 54.184,45.226 54.692,45.734 56.724,45.734
no net on Assembly Notes "NONET_L-01_P-001" (solid): 56.642,40.386 56.642,42.672 59.182,42.672 59.182,40.386
no net on Assembly Notes "NONET_L-01_P-001" (solid): 37.592,40.64 37.592,42.926 39.878,42.926 39.878,40.64
no net on Assembly Notes "NONET_L-01_P-001" (solid): 22.606,40.386 22.606,42.672 24.892,42.672 24.892,40.386
no net on Assembly Notes "NONET_L-01_P-001" (solid): 6.35,36 6.35,18.034 0,18.034 0,36
no net on Fab Notes "NONET_L-01_P-001" (solid): 20.32,44.45 20.32,43.688 20.828,43.18 21.336,43.18 22.352,44.196 23.622,44.196 24.13,44.704 24.13,45.212 23.622,45.72 21.59,45.72
no net on Fab Notes "NONET_L-01_P-001" (solid): 58.008,44.45 58.008,43.688 57.5,43.18 56.992,43.18 55.976,44.196 54.706,44.196 54.198,44.704 54.198,45.212 54.706,45.72 56.738,45.72
no net on Fab Notes "NONET_L-01_P-001" (solid): 35.32,44.45 35.32,43.688 35.828,43.18 36.336,43.18 37.352,44.196 38.622,44.196 39.13,44.704 39.13,45.212 38.622,45.72 36.59,45.72
GND on GND (split plane): 60.49,46.49 60.49,18.51 49.65,18.51 49.55,18.501 49.455,18.472 49.366,18.424 49.289,18.361 49.226,18.284 49.178,18.195 49.149,18.1 49.14,18 49.14,14.31 45.21,14.31 45.21,18 45.201,18.1 45.172,18.195 45.124,18.284 45.061,18.361 44.984,18.424 44.895,18.472 44.8,18.501 44.7,18.51 0.51,18.51 0.51,35.49 6.985,35.49 7.085,35.499 7.18,35.528 7.269,35.576 7.346,35.639 7.409,35.716 7.457,35.805 7.486,35.9 7.495,36 7.495,46.49
3V3 on 3V3 (split plane): 60.49,46.49 60.49,18.51 49.65,18.51 49.55,18.501 49.455,18.472 49.366,18.424 49.289,18.361 49.226,18.284 49.178,18.195 49.149,18.1 49.14,18 49.14,14.31 45.21,14.31 45.21,18 45.201,18.1 45.172,18.195 45.124,18.284 45.061,18.361 44.984,18.424 44.895,18.472 44.8,18.501 44.7,18.51 0.51,18.51 0.51,35.49 6.985,35.49 7.085,35.499 7.18,35.528 7.269,35.576 7.346,35.639 7.409,35.716 7.457,35.805 7.486,35.9 7.495,36 7.495,46.49

## Keep-outs
Keep-Out Layer:
  lines w0.254: 0,18 44.7,18 44.7,13.8 49.65,13.8 49.65,18 61,18 61,47 7,47 7,36 0,36 0,18

## Other copper
Top Layer:
  pour cut-out: 59.032,45.75 59.032,39.15 56.217,39.15 54.756,40.611 52.734,40.611 52.734,45.75
  pour cut-out: 39.782,45.75 39.782,39.15 36.967,39.15 35.506,40.611 33.484,40.611 33.484,45.75
  pour cut-out: 24.782,45.75 24.782,39.15 21.967,39.15 20.506,40.611 18.484,40.611 18.484,45.75
Bottom Layer:
  pour cut-out: 59.032,45.75 59.032,39.15 56.217,39.15 54.756,40.611 52.734,40.611 52.734,45.75
  pour cut-out: 39.782,45.75 39.782,39.15 36.967,39.15 35.506,40.611 33.484,40.611 33.484,45.75
  pour cut-out: 24.777,45.789 24.777,39.189 21.961,39.189 20.5,40.65 18.478,40.65 18.478,45.789
GND (plane layer: these items are gaps in the copper):
  pour cut-out: 59.032,45.75 59.032,40.2 58.15,40.2 56.65,41.7 53.8,41.7 53.8,45.75
  pour cut-out: 39.782,45.75 39.782,40.2 39.07,40.2 37.57,41.7 34.55,41.7 34.55,45.75
  pour cut-out: 24.782,45.75 24.782,40.2 24.043,40.2 22.543,41.7 19.55,41.7 19.55,45.75
3V3 (plane layer: these items are gaps in the copper):
  pour cut-out: 39.782,45.75 39.782,40.2 38.65,40.2 37.35,41.5 34.55,41.5 34.55,45.75
  pour cut-out: 59.032,45.75 59.032,40.2 57.9,40.2 56.6,41.5 53.8,41.5 53.8,45.75
  pour cut-out: 24.782,45.75 24.782,40.2 23.739,40.2 22.489,41.45 19.55,41.45 19.55,45.75

## Silkscreen, mask and mechanical layers (free items; w line width, h text height)
Bottom Overlay:
  text "CLICK A Photodiode Board Rev 7.0 Aug 20,2020 Grant Gunnison" at 49.45,21.25 h0.76
Assembly Notes:
  region: 14.865,29.5 ccw(c12,29.5) 12,32.366 ccw(c12,29.5) 9.134,29.5 ccw(c12,29.5) 12,26.635 ccw(c12,29.5)
  region: 49.25,16 ccw(c47.25,16) 47.25,18 ccw(c47.25,16) 45.25,16 ccw(c47.25,16) 47.25,14 ccw(c47.25,16)
  region: 50.115,41.5 ccw(c47.25,41.5) 47.25,44.365 ccw(c47.25,41.5) 44.384,41.5 ccw(c47.25,41.5) 47.25,38.634 ccw(c47.25,41.5)
Fab Notes:
  region: 49.25,16 ccw(c47.25,16) 47.25,18 ccw(c47.25,16) 45.25,16 ccw(c47.25,16) 47.25,14 ccw(c47.25,16)
  region: 50.115,41.5 ccw(c47.25,41.5) 47.25,44.365 ccw(c47.25,41.5) 44.384,41.5 ccw(c47.25,41.5) 47.25,38.634 ccw(c47.25,41.5)
  region: 14.865,29.5 ccw(c12,29.5) 12,32.366 ccw(c12,29.5) 9.134,29.5 ccw(c12,29.5) 12,26.635 ccw(c12,29.5)